# Altium PCB AGES_PBC.PcbDoc (part 2 of 2)
Units mm, origin at the board's own origin, x right, y up, seen from the top; angles counter-clockwise.
Board outline 190.75 x 141.73 mm, 2 copper layers (Top Layer, Bottom Layer), stack 1.671 mm thick; 38 components, 91 nets, 308 pads, 187 vias.
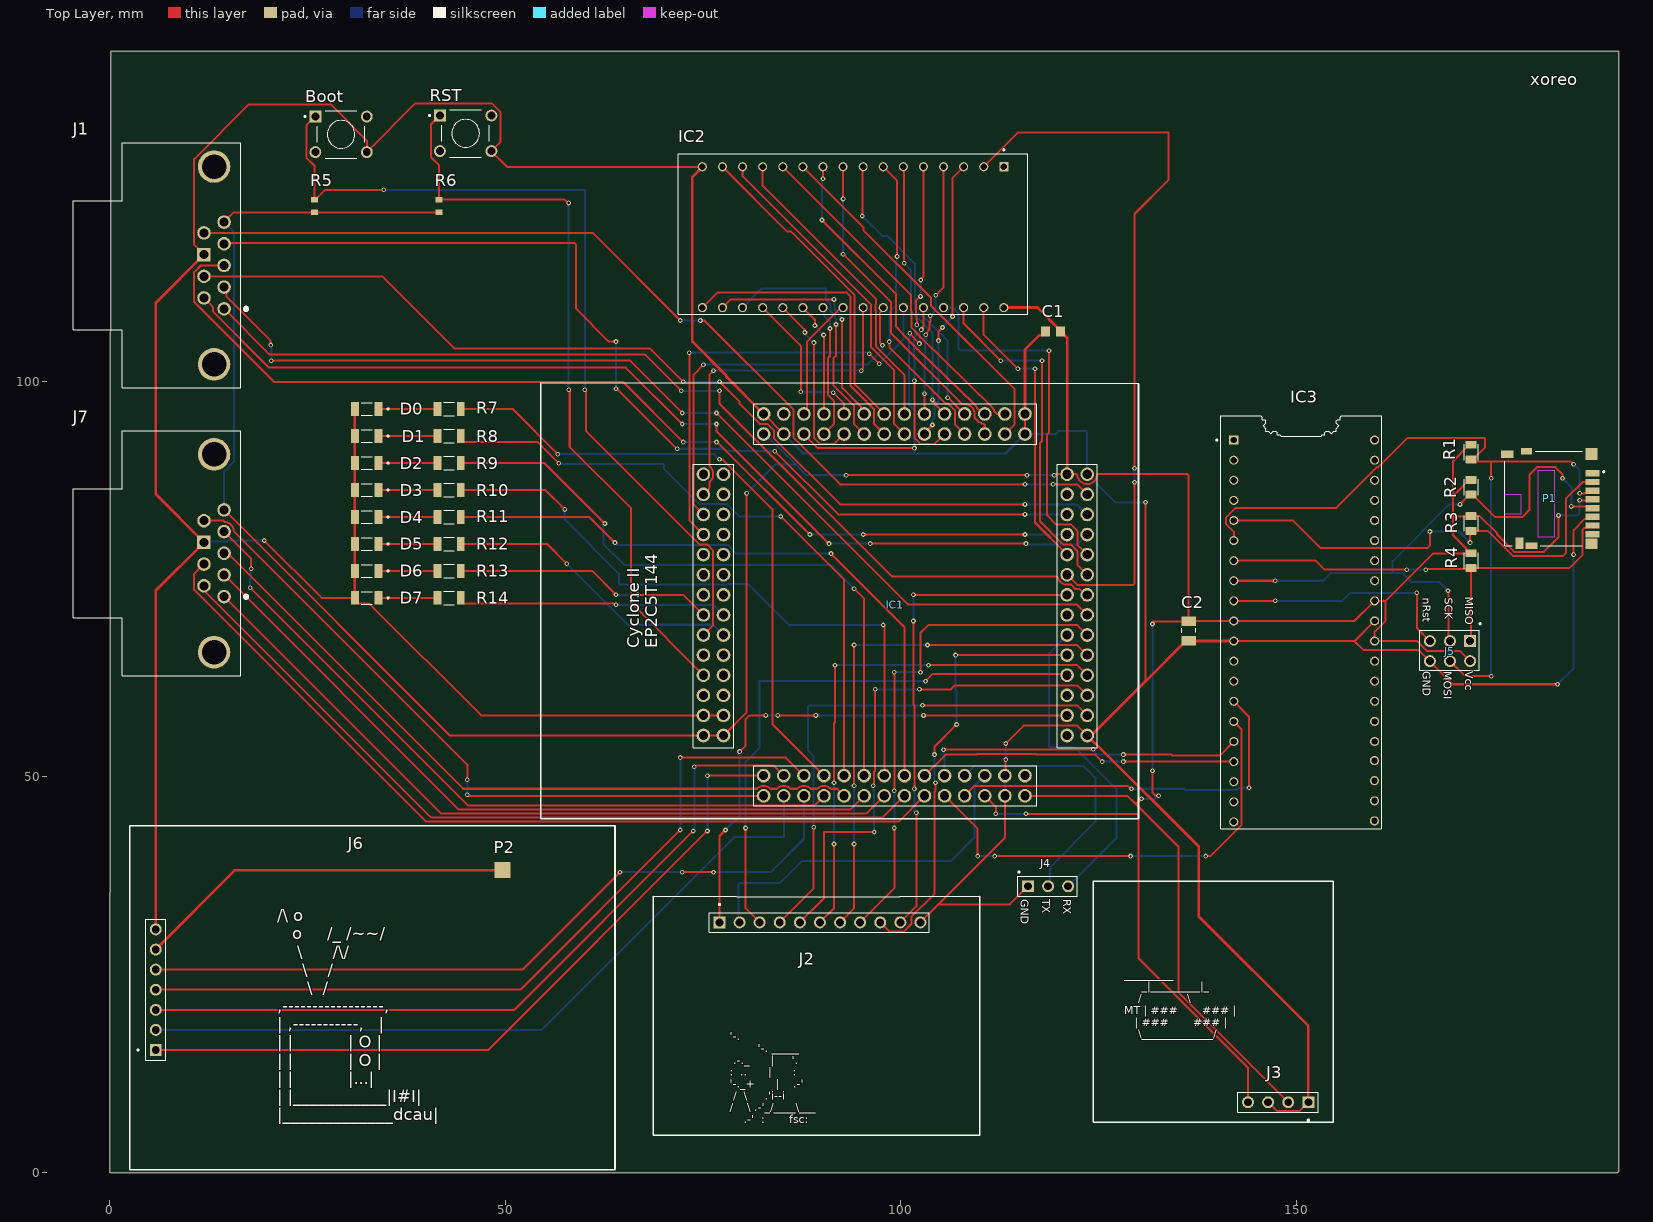
[diagram p0: Top Layer view]

## Via types
v1: diameter 0.6, hole 0.3, Top Layer to Bottom Layer, 187 vias

## Nets (pads, with @x,y where several pads share a name; then routed paths per layer and width w, separated by ;. In a path a pad name is that pad's centre, name@x,y a point inside that pad or via, vN(x,y) a via of type N, cw(c..) or ccw(c..) an arc to the next point about the centre after c; other vN are vias at no path point) (continued)
NetIC1_81: (continued)
  Bottom Layer w0.254: v1(77.851,43.307) 79.629,45.085 v1(79.629,53.213) ; v1(82.931,57.785) v1(84.455,57.785) ; v1(89.281,57.785) v1(102.87,57.785)
NetIC1_82: IC1.82 J2.4 | length 65.3
  Top Layer w0.254: J2.4 89.001,35.915 v1(89.001,43.662) ; v1(102.743,59.055) 122.301,59.055 IC1.82
  Bottom Layer w0.254: v1(89.001,43.662) 89.001,52.64 88.265,53.376 88.265,58.906 88.414,59.055 89.789,59.055 v1(102.743,59.055)
NetIC1_89: IC1.89 IC2.24 | length 15.7
  Top Layer w0.254: IC1.89 87.757,96.283 88.138,96.664 88.138,105.029 92.151,109.042 92.183,109.042 92.468,109.327 IC2.24
NetIC1_90: IC1.90 IC2.28 | length 36.1
  Top Layer w0.254: IC1.90 89.535,91.567 v1(101.727,91.567) ; v1(101.129,106.082) v1(102.362,104.775) ; v1(102.613,106.55) 102.613,106.644 102.87,106.901 IC2.28
  Bottom Layer w0.254: v1(101.129,106.082) 101.129,105.357 101.046,105.274 101.046,97.055 101.727,96.374 v1(101.727,91.567) ; v1(102.362,104.775) 102.362,106.205 102.613,106.457 v1(102.613,106.55)
NetIC1_91: IC1.91 IC2.22 | length 14.5
  Top Layer w0.254: IC2.22 89.154,107.803 v1(89.154,107.061) ; v1(90.251,105.859) 90.274,105.836 90.274,95.908 IC1.91
  Bottom Layer w0.254: v1(89.154,107.061) 89.732,106.483 89.732,106.377 v1(90.251,105.859)
NetIC1_92: IC1.92 IC2.23 | length 17.3
  Top Layer w0.254: IC1.92 91.541,94.589 91.541,97.541 90.785,98.296 90.785,102.935 91.059,103.209 v1(91.059,106.68)
  Bottom Layer w0.254: IC2.23 90.257,109.24 90.257,108.371 91.059,107.569 v1(91.059,106.68)
NetIC1_93: IC1.93 IC2.20 | length 20
  Top Layer w0.254: IC2.20 87.376,104.501 v1(87.376,98.679) ; v1(91.466,98.578) 92.823,97.222 92.823,95.899 IC1.93
  Bottom Layer w0.254: v1(87.376,98.679) 87.426,98.629 91.416,98.629 v1(91.466,98.578)
NetIC1_94: IC1.94 IC2.21 | length 22.6
  Top Layer w0.254: IC2.21 87.818,106.599 87.818,106.238 v1(87.884,106.172) ; v1(89.027,104.902) 89.027,92.856 89.782,92.101 91.593,92.101 IC1.94
  Bottom Layer w0.254: v1@88.011,106.045 88.011,105.918 v1(89.027,104.902)
NetIC1_95: IC1.95 IC2.18 | length 30.6
  Top Layer w0.254: IC2.18 78.506,110.363 v1(91.567,110.363) ; v1(92.583,107.823) 92.583,99.187 95.006,96.764 95.006,96.654 95.377,96.283 IC1.95
  Bottom Layer w0.254: v1(91.567,110.363) 91.633,110.297 91.633,109.934 ; 91.634,109.933 91.634,109.051 92.202,108.483 92.202,108.298 92.583,107.917 v1(92.583,107.823)
NetIC1_96: IC1.96 IC2.19 | length 32.2
  Top Layer w0.254: v1(91.821,107.188) 91.821,103.252 91.477,102.908 91.477,99.531 94.081,96.927 94.081,94.641 IC1.96
  Bottom Layer w0.254: IC2.19 82.443,111.76 90.551,111.76 90.551,110.298 91.126,109.723 91.126,108.841 91.694,108.273 91.694,107.996 91.821,107.869 v1(91.821,107.188)
NetIC1_97: IC1.97 IC2.15 | length 40
  Top Layer w0.254: IC2.15 85.676,118.921 86.14,118.921 94.174,110.887 94.174,99.628 IC1.97
NetIC1_98: IC1.98 IC2.17 | length 38.9
  Top Layer w0.254: IC2.17 76.855,111.252 93.091,111.252 93.666,110.677 93.666,99.418 96.621,96.463 96.621,94.641 IC1.98
NetIC1_99: IC1.99 IC2.13 | length 38.7
  Top Layer w0.254: IC2.13 82.55,124.714 96.901,110.363 96.901,109.79 96.834,109.723 96.834,108.931 96.901,108.864 96.901,104.394 100.457,100.838 IC1.99
NetIC1_100: IC1.100 IC2.14 | length 42.3
  Top Layer w0.254: IC2.14 80.01,125.919 96.266,109.663 96.266,104.311 99.161,101.416 99.161,94.641 IC1.100
NetIC1_101: IC1.101 IC2.4 | length 32.2
  Top Layer w0.254: IC1.101 v1(102.997,98.425) ; v1(103.166,105.899) 103.632,106.68 103.632,107.497 103.733,107.597 v1(103.733,108.305) ; v1(104.415,110.892) 105.41,111.887 IC2.4
  Bottom Layer w0.254: v1(102.997,98.425) 102.997,101.798 103.043,101.844 103.043,105.057 103.166,105.18 v1(103.166,105.899) ; v1(103.733,108.305) 104.394,108.966 104.394,110.871 v1(104.415,110.892)
NetIC1_102: IC1.102 IC2.3 | length 35.8
  Top Layer w0.254: IC1.102 102.997,93.472 v1(104.013,94.488) ; v1(104.775,105.156) 104.775,106.299 v1(105.283,106.807) ; v1(106.553,108.204) 106.553,125.73 IC2.3
  Bottom Layer w0.254: v1(104.013,94.488) 104.04,94.515 104.04,95.169 104.293,95.423 104.293,96.98 104.775,97.462 v1(104.775,105.156) ; v1(105.283,106.807) 105.283,106.87 106.553,108.14 v1(106.553,108.204)
NetIC1_103: IC1.103 IC2.6 | length 33.4
  Top Layer w0.254: IC2.6 100.393,127.063 100.393,114.998 v1(100.457,114.935) ; v1(104.013,97.663) 104.013,97.589 104.457,97.144 104.457,96.965 IC1.103
  Bottom Layer w0.254: v1(100.457,114.935) 101.286,114.106 101.286,108.841 102.264,107.863 102.297,107.863 104.013,106.147 v1(104.013,97.663)
NetIC1_104: IC1.104 IC2.5 | length 39.1
  Top Layer w0.254: v1(101.727,100.076) 101.727,92.856 102.482,92.101 104.293,92.101 IC1.104 ; v1(102.026,107.171) 101.985,108.306 101.981,108.405 101.914,108.472 101.914,110.169 v1(102.489,110.744) ; v1(102.526,112.813) 102.526,112.907 102.87,113.251 IC2.5
  Bottom Layer w0.254: v1(101.727,100.076) 101.727,103.425 101.681,103.471 101.681,105.563 101.854,105.736 101.854,106.807 ; v1(102.489,110.744) 102.489,112.776 v1(102.526,112.813)
NetIC1_105: IC1.105 IC2.8 | length 37.2
  Top Layer w0.254: v1(95.123,120.904) 95.186,120.968 95.186,127.063 IC2.8 ; v1(105.918,97.917) 105.982,97.917 107.003,96.896 ; 107.004,96.895 ccw(c107.183,97.075) 107.009,96.891 IC1.105
  Bottom Layer w0.254: v1(95.123,120.904) 97.642,118.385 98.277,118.385 101.794,114.868 101.794,109.28 101.914,109.16 101.914,108.931 102.474,108.371 102.703,108.371 105.918,105.156 v1(105.918,97.917)
NetIC1_106: IC1.106 IC2.7 | length 39
  Top Layer w0.254: IC2.7 99.542,125.375 v1(99.542,115.798) ; v1(98.552,105.029) 98.552,104.32 105.636,97.236 105.945,97.236 106.833,96.347 106.833,94.589 IC1.106
  Bottom Layer w0.254: v1(98.552,105.029) 98.552,108.737 99.375,109.56 99.375,114.99 99.502,115.117 99.502,115.758 v1(99.542,115.798)
NetIC1_107: IC1.107 IC2.10 | length 40
  Top Layer w0.254: v1(90.043,120.396) 99.374,111.065 99.374,106.979 100.448,105.8 101.681,104.493 102.08,104.094 109.292,97.146 cw(c108.077,95.885) 109.697,96.551 109.732,96.516 110.363,95.885 IC1.107 ; v1(90.17,125.603) IC2.10
  Bottom Layer w0.254: v1(90.043,120.396) 90.043,125.382 90.17,125.509 v1(90.17,125.603)
NetIC1_108: IC1.108 IC2.9 | length 41.8
  Top Layer w0.254: v1(92.71,116.078) 98.746,110.042 98.746,106.093 98.895,105.944 107.686,97.188 ccw(c107.866,97.368) 107.715,97.163 108.181,97.124 cw(c108.077,95.885) 109.321,95.885 109.321,95.413 109.358,95.375 109.737,94.996 ccw(c110.616,95.876) 110.185,94.71 110.468,94.641 110.617,94.493 IC1.108 ; v1(92.71,123.063) IC2.9
  Bottom Layer w0.254: v1(92.71,116.078) v1(92.71,123.063)
NetIC1_109: IC1.109 IC2.12 | length 43.4
  Top Layer w0.254: IC2.12 101.212,111.005 101.286,110.931 101.348,106.827 101.81,106.364 102.309,105.771 102.316,105.763 102.623,105.456 102.644,105.456 111.488,96.773 cw(c110.617,95.885) 111.818,96.208 111.863,96.163 112.141,95.885 IC1.109
NetIC1_110: IC1.110 IC2.11 | length 45.4
  Top Layer w0.254: IC2.11 95.276,119.481 95.276,119.1 103.826,110.55 103.826,109.559 114.401,98.985 114.401,94.589 IC1.110
NetIC3_5: IC3.5 P1.2 R3.1 | length 59.9
  Top Layer w0.254: IC3.5 149.564,82.423 153.06,78.927 166.557,78.927 166.878,79.248 v1(166.878,81.026) ; v1(171.958,79.629) 171.958,80.98 R3.1 174.192,81.107 177.352,77.947 183.716,77.947 184.074,78.304 184.074,85.171 186.189,87.286 P1.2
  Bottom Layer w0.254: v1(166.878,81.026) 170.561,81.026 v1(171.958,79.629)
NetIC3_6: IC3.6 J5.4 P1.3 R1.1 | length 95.9
  Top Layer w0.254: IC3.6 142.093,80.994 141.137,81.95 141.137,82.819 142.325,84.007 155.045,84.007 160.125,89.087 160.289,89.087 164.077,92.875 173.714,92.875 173.863,92.726 173.863,91.692 172.295,90.124 R1.1 172.304,89.905 174.625,89.905 ; J5.4 171.323,62.738 v1(174.625,62.738) ; v1(174.625,87.757) 174.625,89.905 ; v1(185.039,89.535) 184.669,89.905 174.625,89.905 ; v1(185.801,85.852) 186.397,85.852 186.458,85.913 187.172,85.913 P1.3
  Bottom Layer w0.254: v1(174.625,62.738) v1(174.625,87.757) ; v1(185.039,89.535) 185.801,88.773 v1(185.801,85.852)
NetIC3_7: IC3.7 J5.1 P1.7 R4.1 | length 59
  Top Layer w0.254: IC3.7 152.448,77.343 153.591,76.2 v1@163.703,76.2 ; v1(166.37,76.2) 166.436,76.266 171.943,76.266 R4.1 ; J5.1 172.085,67.31 R4.1 ; P1.7 187.172,81.513 186.594,81.513 186.548,81.467 186.412,81.467 186.189,81.244 186.189,78.112 184.485,76.408 R4.1
  Bottom Layer w0.254: v1(163.957,76.2) v1(166.37,76.2)
NetIC3_8: IC3.8 J5.3 P1.5 R2.1 | length 75.4
  Top Layer w0.254: IC3.8 v1(147.32,74.803) ; v1(169.164,73.533) 169.23,73.467 169.23,67.371 J5.3 ; v1(170.688,84.455) 170.688,84.492 171.875,85.679 R2.1 172.295,85.679 175.119,82.855 178.528,82.855 179.47,83.797 179.47,88.225 180.412,89.167 182.728,89.167 183.642,88.253 v1(183.642,87.757) ; v1(184.755,84.201) 187.23,84.201 P1.5
  Bottom Layer w0.254: v1(147.32,74.803) 153.373,74.803 154.329,75.759 162.179,75.759 ; v1(169.164,73.533) 168.051,74.646 164.548,74.646 163.435,75.759 162.179,75.759 ; v1(170.688,84.455) 169.344,84.455 162.179,77.29 162.179,75.759 ; v1(183.642,87.757) 184.755,86.644 v1(184.755,84.201)
NetIC3_9: IC3.9 J5.5 | length 30.3
  Top Layer w0.254: IC3.9 v1(147.32,72.263) ; v1(165.227,73.279) 165.227,68.834 J5.5
  Bottom Layer w0.254: v1(147.32,72.263) 155.812,72.263 156.828,73.279 v1(165.227,73.279)
pads on no net: Boot.2 Boot.3 IC1.1 IC1.2 IC1.4 IC1.6 IC1.8 IC1.9 IC1.10 IC1.11 IC1.12 IC1.13 IC1.14 IC1.19 IC1.20 IC1.22 IC1.23 IC1.24 IC1.56 IC1.59 IC1.71 IC1.79 IC1.83 IC1.87 IC2.1 IC3.1 IC3.2 IC3.3 IC3.4 IC3.12 IC3.13 IC3.18 IC3.19 IC3.20 IC3.21 IC3.22 IC3.23 IC3.24 IC3.25 IC3.26 IC3.27 IC3.28 IC3.29 IC3.33 IC3.34 IC3.35 IC3.36 IC3.37 IC3.38 IC3.39 IC3.40 J1.S1 J1.S2 J7.S1 J7.S2 P1.1 P1.8 P1.S1 P1.S2 P1.S3 P1.S4 P1.SW-A P1.SW-B RST.2 RST.3

## Silkscreen, mask and mechanical layers (free items; w line width, h text height)
Top Overlay:
  lines w0.2: 151.511,6.35 154.686,6.35 ; 154.686,6.35 154.686,36.83 124.333,36.83 124.333,6.35 154.686,6.35 ; 2.54,0.381 63.881,0.381 63.881,43.815 2.54,43.815 2.54,23.114 2.54,0.381 ; 68.707,4.699 68.707,34.925 89.789,34.798 109.982,34.925 109.982,4.699 68.707,4.699
  text "xoreo" at 179.578,137.414 h1.52
  text "MISO" at 171.323,72.771 h1 r270
  text "nRst" at 165.989,72.644 h1 r270
  text "SCK" at 168.783,72.644 h1 r270
  text "GND" at 165.989,63.373 h1 r270
  text "MOSI" at 168.656,63.373 h1 r270
  text "Vcc" at 171.323,63.373 h1 r270
  text "GND" at 115.189,34.544 h1 r270
  text "TX" at 117.856,34.544 h1 r270
  text "RX" at 120.523,34.544 h1 r270
  text "_________ /      _|_________|_ /     /             \ / MT | ###       ### | /    | ###       ### | /     \_____________/" at 128.27,17.018 h1
  text "/\ o  /    o     /_ /~~/ /     \      /\/ /      \    /    /       \  /    / ,-----------------, / | ,-----------,   | / | |           | O | / | |           | O | / | |           |...| / | |___________|I#I| / |_____________dcau|" at 21.209,6.604 h1.52
  text "'-. /         '-. _____     /  .-._      |     '.   / :  ..      |      :   / '-._+      |    .-' /  /  \     .'i--i / /    \ .-'_/____\___ /     .-'  :       fsc:" at 78.359,6.223 h1
Bottom Overlay:
  drawing of 39 lines, arcs and shapes, not listed
  text "There will be no order, only chaos / -PI" at 188.214,2.667 h1.52
BoardOutline:
  lines w0.2: 0,0 190.754,0 190.754,141.732 0.127,141.732 0,0

## Text inside footprints (layer, text, board x,y; h text height)
IC1: Top Overlay "Cyclone II / EP2C5T144" at 69.215,66.294 h1.52 r90